# EAGLE board Board (EAGLE 5.06)
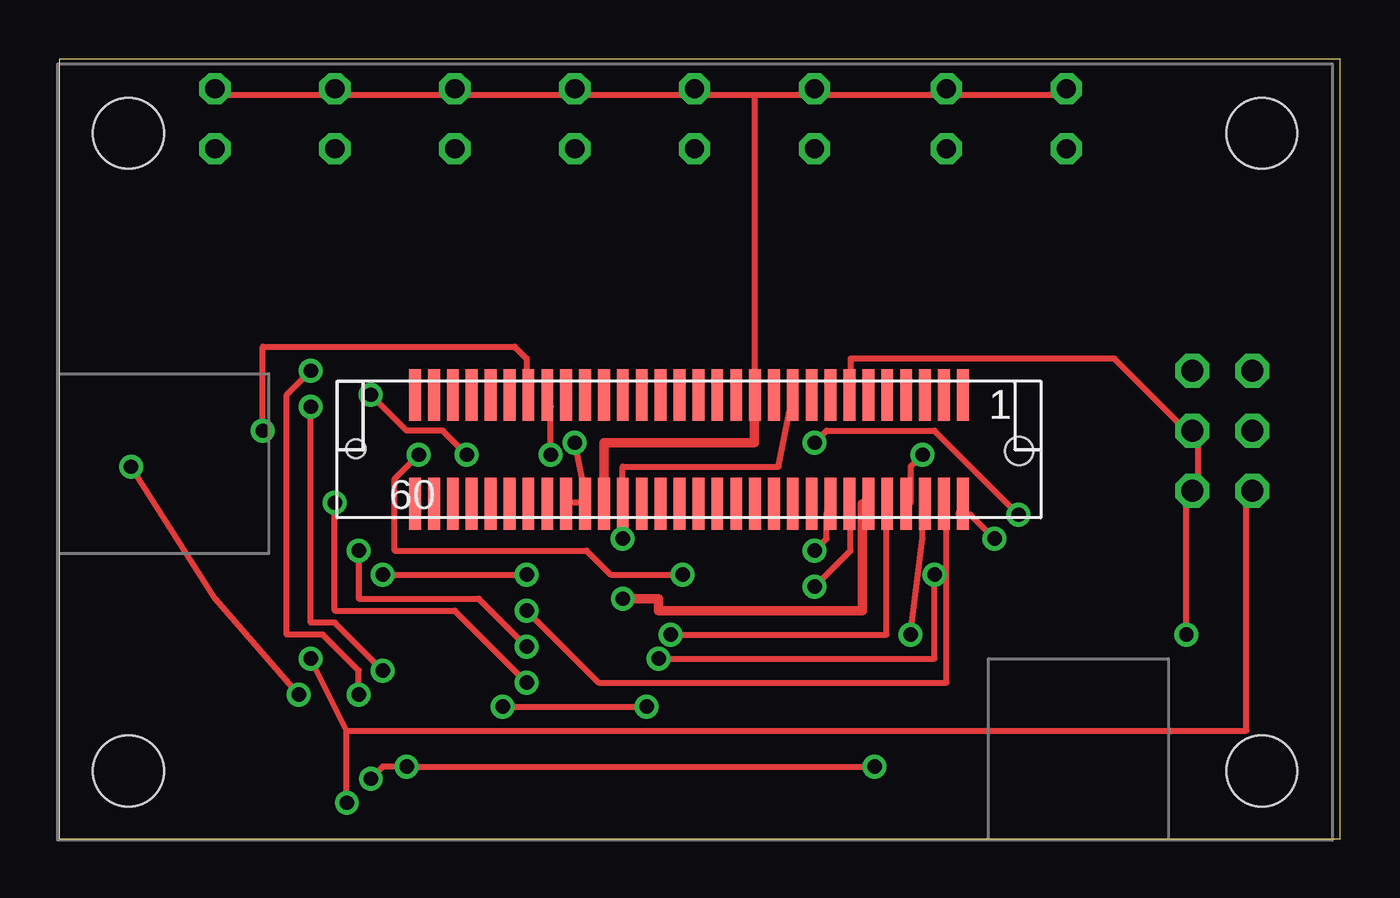
[diagram p0: board, top side]
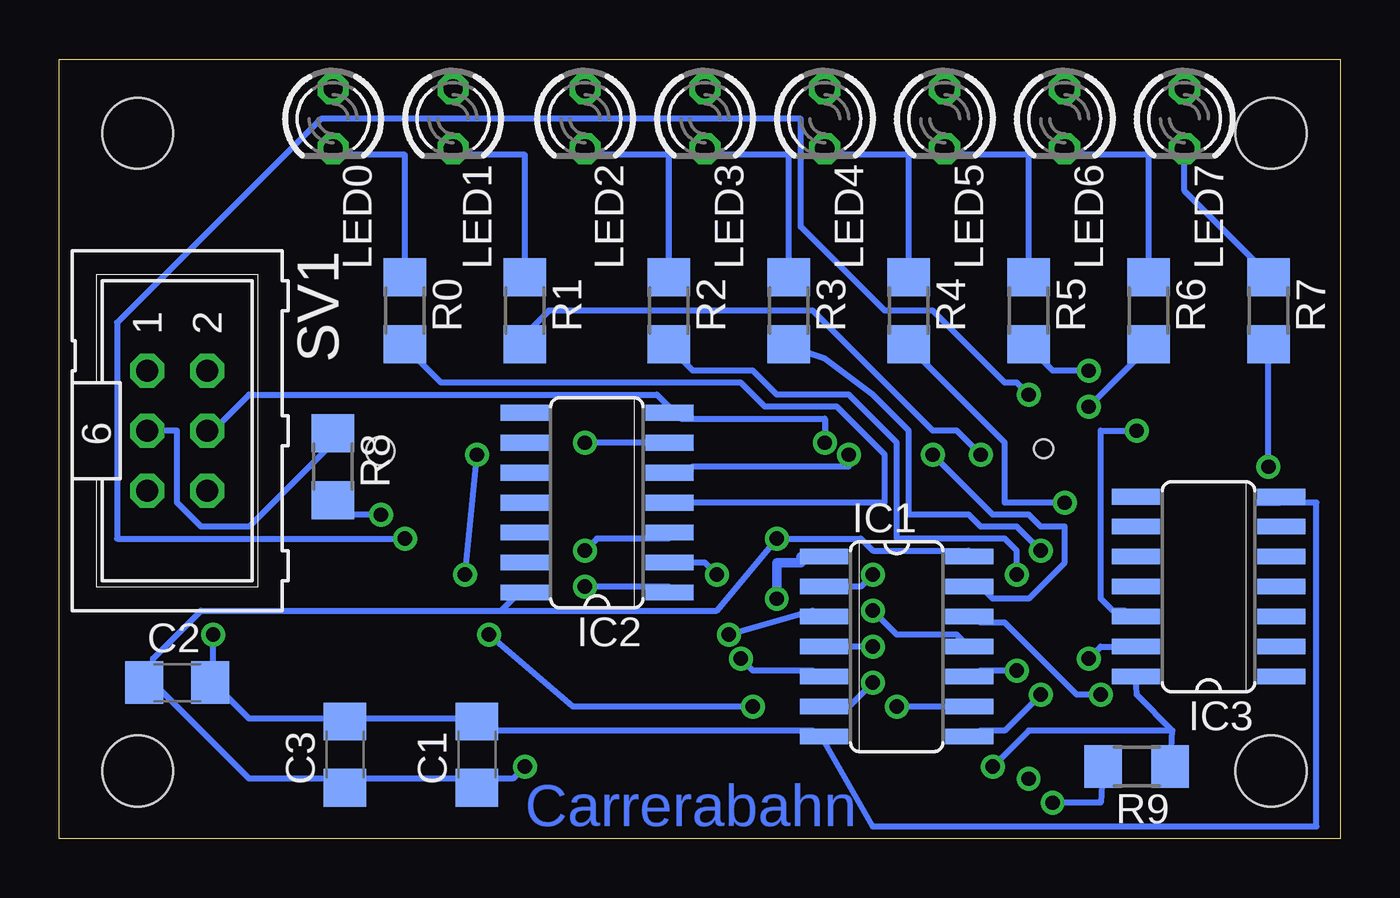
[diagram p1: board, bottom side, seen from below]

Size 54.28 x 33.01 mm. Coordinates in mm from the lower left corner, seen from the top.
Outline: 0,0 54.28,0 54.28,33.01 0,33.01 0,0
Copper layers (1*16): Top 0.035mm / dielectric 1.5mm / Bottom 0.035mm
Design rules "default": minimum track width 10mil, minimum drill 24mil, track to track 8mil, track to pad 8mil, pad to pad 8mil, via to via 8mil, smd to smd 8mil, copper to edge 40mil, drill to drill 8mil, minimum pad ring 10mil, minimum via ring 8mil, stop-mask expansion 4mil, vias tented up to drill 0mil, thermal gap 10mil

## Footprints (pad centres in the part's own frame; a part is rotated, then mirrored left to right if it is on the bottom)
C1206 = smd 1.6 x 1.8: 1 -1.4,0; 2 1.4,0
SO14 = smd 0.66 x 2.032: 1 -3.81,-3.073; 2 -2.54,-3.073; 3 -1.27,-3.073; 4 0,-3.073; 5 1.27,-3.073; 6 2.54,-3.073; 7 3.81,-3.073; 8 3.81,3.073; 9 2.54,3.073; 10 1.27,3.073; 11 0,3.073; 12 -1.27,3.073; 13 -2.54,3.073; 14 -3.81,3.073
LED3MM = drill 0.813 octagon: A -1.27,0; K 1.27,0
MCU_BOARD = smd 0.5 x 2.2: 1 11.612,2.274; 2 10.812,2.274; 3 10.012,2.274; 4 9.212,2.274; 5 8.412,2.274; 6 7.612,2.274; 7 6.812,2.274; 8 6.012,2.274; 9 5.212,2.274; 10 4.412,2.274; 11 3.612,2.274; 12 2.812,2.274; 13 2.012,2.274; 14 1.212,2.274; 15 0.412,2.274; 16 -0.388,2.274; 17 -1.188,2.274; 18 -1.988,2.274; 19 -2.788,2.274; 20 -3.588,2.274; 21 -4.388,2.274; 22 -5.188,2.274; 23 -5.988,2.274; 24 -6.788,2.274; 25 -7.588,2.274; 26 -8.388,2.274; 27 -9.188,2.274; 28 -9.988,2.274; 29 -10.788,2.274; 30 -11.588,2.274; 31 11.612,-2.326; 32 10.812,-2.326; 33 10.012,-2.326; 34 9.212,-2.326; 35 8.412,-2.326; 36 7.612,-2.326; 37 6.812,-2.326; 38 6.012,-2.326; 39 5.212,-2.326; 40 4.412,-2.326; 41 3.612,-2.326; 42 2.812,-2.326; 43 2.012,-2.326; 44 1.212,-2.326; 45 0.412,-2.326; 46 -0.388,-2.326; 47 -1.188,-2.326; 48 -1.988,-2.326; 49 -2.788,-2.326; 50 -3.588,-2.326; 51 -4.388,-2.326; 52 -5.188,-2.326; 53 -5.988,-2.326; 54 -6.788,-2.326; 55 -7.588,-2.326; 56 -8.388,-2.326; 57 -9.188,-2.326; 58 -9.988,-2.326; 59 -10.788,-2.326; 60 -11.588,-2.326 | hole 3: -23.728,-13.642; -23.728,13.358; 24.272,-13.642; 24.272,13.358 | hole 0.8: -14.1,0 | hole 1.2: 14,-0.1
R1206 = smd 1.6 x 1.803: 1 -1.422,0; 2 1.422,0
ML6 = drill 0.914 octagon: 1 -2.54,-1.27; 2 -2.54,1.27; 3 0,-1.27; 4 0,1.27; 5 2.54,-1.27; 6 2.54,1.27

## Placement (x,y rotation side)
C1  100nF  [C1206]  36.58,3.56 90 bottom
C2  100nF  [C1206]  49.28,6.6 0 bottom
C3  100nF  [C1206]  42.16,3.56 90 bottom
IC1  74AC06D  [SO14]  18.8,8.13 270 bottom
IC2  74ACT06D  [SO14]  31.5,14.22 90 bottom
IC3  74AC14D  [SO14]  5.59,10.67 90 bottom
LED0  [LED3MM]  42.67,30.48 270 bottom
LED1  [LED3MM]  37.59,30.48 270 bottom
LED2  [LED3MM]  32,30.48 270 bottom
LED3  [LED3MM]  26.92,30.48 270 bottom
LED4  [LED3MM]  21.84,30.48 270 bottom
LED5  [LED3MM]  16.76,30.48 270 bottom
LED6  [LED3MM]  11.68,30.48 270 bottom
LED7  [LED3MM]  6.6,30.48 270 bottom
MCU_BOARD1  [MCU_BOARD]  26.67,16.51 0 top
R0  150  [R1206]  39.62,22.35 270 bottom
R1  150  [R1206]  34.54,22.35 270 bottom
R2  150  [R1206]  28.45,22.35 270 bottom
R3  150  [R1206]  23.37,22.35 270 bottom
R4  150  [R1206]  18.29,22.35 270 bottom
R5  150  [R1206]  13.21,22.35 270 bottom
R6  150  [R1206]  8.13,22.35 270 bottom
R7  150  [R1206]  3.05,22.35 270 bottom
R8  18  [R1206]  42.67,15.75 270 bottom
R9  10K  [R1206]  8.64,3.05 180 bottom
SV1  [ML6]  49.28,17.27 270 bottom

## Library data of the parts
C1-C3 = rcl
IC1-IC3 = 74xx-eu
LED0 LED1-LED7 = led
MCU_BOARD1 = M_MCU-Board
R0 R1-R9 = resistor
SV1 = con-harting-ml

## Nets
3,3V: C1.1 C2.1 C3.1 IC1.14 IC2.14 IC3.14 MCU_BOARD1.10 MCU_BOARD1.49 R9.1
GND: C1.2 C2.2 C3.2 IC1.7 IC2.7 IC3.7 MCU_BOARD1.7 MCU_BOARD1.51 MCU_BOARD1.52 SV1.4 SV1.6
LED0: IC2.3 MCU_BOARD1.38
LED1: IC2.1 MCU_BOARD1.37
LED2: IC1.1 MCU_BOARD1.36
LED3: IC1.3 MCU_BOARD1.35
LED4: IC1.5 MCU_BOARD1.34
LED5: IC1.9 MCU_BOARD1.33
LED6: IC1.11 MCU_BOARD1.32
LED7: IC1.13 MCU_BOARD1.31
LS: IC3.13 R9.2 SV1.5
LS_AUS: IC2.5 MCU_BOARD1.23
LS_EIN: IC3.12 MCU_BOARD1.24
N$1: IC1.2 R2.2
N$2: IC1.4 R3.2
N$3: IC1.6 R4.2
N$4: IC1.8 R5.2
N$5: IC1.10 R6.2
N$6: IC1.12 R7.2
N$7: LED2.K R2.1
N$8: LED3.K R3.1
N$9: LED4.K R4.1
N$10: LED5.K R5.1
N$11: LED6.K R6.1
N$12: LED7.K R7.1
N$14: IC2.6 R8.2
N$15: LED1.K R1.1
N$16: IC2.2 R1.2
N$17: IC2.4 R0.2
N$19: R8.1 SV1.3
N$20: LED0.K R0.1
VCC: LED0.A LED1.A LED2.A LED3.A LED4.A LED5.A LED6.A LED7.A MCU_BOARD1.12 MCU_BOARD1.50

## Tracks (layer width: path | path; a pad name or v marks a point on that pad's centre or on a via)
3,3V  (via drill 0.6, 0.61)
  Top 0.254: MCU_BOARD1.10 30.99,18.29 30.48,15.75 23.88,15.75 23.88,14.22 MCU_BOARD1.49 23.88,13.72 v23.88,12.7 | v13.21,2.54 13.72,3.05 v14.73,3.05 v34.54,3.05
  Bottom 0.254: v14.73,3.05 13.21,4.57 7.11,4.57 | 7.11,4.57 8.64,6.1 IC3.14 | 36.58,2.54 42.16,2.54 | 50.29,6.6 46.23,2.54 42.16,2.54 | 42.16,2.54 C3.1 | 35.56,9.65 35.05,10.16 IC2.14 | 35.56,9.65 48.26,9.65 50.29,7.62 50.29,6.6 | 50.29,6.6 C2.1 | 35.56,9.65 26.42,9.65 v23.88,12.7 20.32,12.7 19.81,12.19 15.75,12.19 IC1.14 | v34.54,3.05 35.05,2.54 36.58,2.54 | 36.58,2.54 C1.1 | R9.1 7.11,4.57
GND  (via drill 0.61)
  Top 0.254: 22.35,14.22 21.34,14.22 MCU_BOARD1.52 | MCU_BOARD1.7 33.53,18.8 33.53,20.32 44.7,20.32 47.75,17.27 SV1.4 48.26,17.27 48.26,14.73 SV1.6 47.75,14.73 v47.75,8.64 | v21.84,16.76 22.35,14.22 | 22.35,14.22 MCU_BOARD1.51
  Bottom 0.254: SV1.4 47.75,17.27 46.23,18.8 28.96,18.8 28.45,18.29 IC2.7 27.94,17.78 21.84,17.78 v21.84,16.76 | 42.16,5.08 36.58,5.08 C1.2 36.58,4.57 22.35,4.57 IC1.7 21.84,4.06 19.81,0.51 1.02,0.51 1.02,14.22 2.54,14.22 | 47.75,6.6 46.23,5.08 42.16,5.08 | 42.16,5.08 C3.2 | 3.56,14.22 2.54,14.22 | 2.54,14.22 IC3.7 | 47.75,6.6 v47.75,8.64 | 47.75,6.6 C2.2
LED0  (via drill 0.61)
  Top 0.254: v32,12.19 32.51,12.7 32.51,13.72 MCU_BOARD1.38
  Bottom 0.254: v32,12.19 31.5,12.7 28.45,12.7 IC2.3
LED1  (via drill 0.61)
  Top 0.254: v32,10.67 33.53,12.19 33.53,13.72 MCU_BOARD1.37
  Bottom 0.254: v32,10.67 28.45,10.67 IC2.1
LED2  (via drill 0.6)
  Top 0.406: MCU_BOARD1.36 34.04,14.18 34.04,9.65 25.4,9.65 25.4,10.16 v23.88,10.16
  Bottom 0.406: IC1.1 22.86,11.94 22.86,11.68 23.88,11.68 v23.88,10.16
LED3  (via drill 0.61)
  Top 0.254: v25.91,8.64 35.05,8.64 35.05,13.72 MCU_BOARD1.35
  Bottom 0.254: v25.91,8.64 22.35,9.65 IC1.3
LED4  (via drill 0.61)
  Top 0.254: v25.4,7.62 37.08,7.62 v37.08,11.18 | v36.58,16.26 36.07,15.75 36.07,14.22 MCU_BOARD1.34
  Bottom 0.254: v25.4,7.62 24.89,7.11 22.35,7.11 IC1.5 | v37.08,11.18 v36.58,16.26
LED5  (via drill 0.61)
  Top 0.254: v18.8,5.59 v24.89,5.59 | v36.07,8.64 36.58,12.7 36.58,13.72 MCU_BOARD1.33
  Bottom 0.254: v24.89,5.59 32.51,5.59 v36.07,8.64 | IC1.9 v18.8,5.59
LED6  (via drill 0.61)
  Top 0.254: v19.81,9.65 22.86,6.6 37.59,6.6 37.59,13.72 MCU_BOARD1.32
  Bottom 0.254: v19.81,9.65 18.8,8.64 16.26,8.64 15.75,8.13 IC1.11
LED7  (via drill 0.61)
  Top 0.254: v17.27,16.26 16.26,17.27 14.73,17.27 v13.21,18.8 | v39.62,12.7 38.61,13.72 38.1,13.72 MCU_BOARD1.31
  Bottom 0.254: v17.27,16.26 14.73,13.72 13.21,13.72 12.7,13.21 11.68,13.21 11.68,11.68 13.21,10.16 14.73,10.16 15.24,10.67 IC1.13 | v13.21,18.8 13.72,19.3 14.22,19.3 17.27,22.35 19.3,22.35 22.86,25.91 22.86,30.48 43.18,30.48 51.82,21.84 51.82,12.7 v39.62,12.7
LS  (via drill 0.6, 0.61)
  Top 0.254: 12.19,4.57 v10.67,7.62 | v12.19,1.52 12.19,4.57 | 12.19,4.57 50.29,4.57 50.29,14.73 SV1.5
  Bottom 0.254: v10.67,7.62 10.16,8.13 IC3.13 | v12.19,1.52 10.16,1.52 R9.2
LS_AUS  (via drill 0.61)
  Top 0.254: v20.83,16.26 20.83,18.29 MCU_BOARD1.23
  Bottom 0.254: v20.83,16.26 20.83,15.75 27.43,15.75 IC2.5
LS_EIN  (via drill 0.61)
  Top 0.254: v8.64,17.27 8.64,20.83 19.3,20.83 19.81,20.32 19.81,18.8 MCU_BOARD1.24
  Bottom 0.254: v8.64,17.27 10.16,17.27 10.16,10.16 9.65,9.65 9.14,9.65 IC3.12
N$1  (via drill 0.61)
  Top 0.254: v13.72,11.18 v19.81,11.18
  Bottom 0.254: v13.72,11.18 13.72,12.19 14.22,12.7 18.8,12.7 18.8,16.76 20.83,18.8 23.88,18.8 24.89,19.81 27.43,19.81 28.45,20.83 R2.2 | v19.81,11.18 20.32,10.67 IC1.2
N$2  (via drill 0.61)
  Top 0.254: v12.7,12.19 12.7,10.16 17.78,10.16 v19.81,8.13
  Bottom 0.254: v12.7,12.19 13.72,13.21 15.24,13.21 15.75,13.72 18.29,13.72 18.29,17.27 19.81,18.8 21.84,20.32 23.37,20.83 R3.2 | v19.81,8.13 IC1.4
N$3  (via drill 0.61)
  Top 0.254: v11.68,14.22 11.68,9.65 16.76,9.65 v19.81,6.6
  Bottom 0.254: v11.68,14.22 14.22,14.22 14.22,16.76 18.29,20.83 R4.2 | v19.81,6.6 20.83,5.59 IC1.6
N$4  (via drill 0.61)
  Top 0.254: v10.67,19.81 9.65,18.8 9.65,8.64 11.18,8.64 12.7,7.11 v12.7,6.1
  Bottom 0.254: v10.67,19.81 12.19,19.81 13.21,20.83 R5.2 | v12.7,6.1 14.22,4.57 15.24,4.57 IC1.8
N$5  (via drill 0.61)
  Top 0.254: v10.67,18.29 10.67,9.14 11.68,9.14 v13.72,7.11
  Bottom 0.254: v10.67,18.29 8.13,20.83 R6.2 | v13.72,7.11 15.24,7.11 IC1.10
N$6  (via drill 0.61)
  Top 0.254: v3.05,15.75 6.6,10.16 v10.16,6.1
  Bottom 0.254: v10.16,6.1 11.18,6.1 14.22,9.14 15.24,9.14 IC1.12 | v3.05,15.75 R7.2
N$7
  Bottom 0.254: R2.1 28.45,28.96 32,28.96 LED2.K
N$8
  Bottom 0.254: R3.1 23.37,28.96 26.92,28.96 LED3.K
N$9
  Bottom 0.254: R4.1 18.29,28.96 21.84,28.96 LED4.K
N$10
  Bottom 0.254: R5.1 13.21,28.96 16.76,28.96 LED5.K
N$11
  Bottom 0.254: R6.1 8.13,28.96 11.68,28.96 LED6.K
N$12
  Bottom 0.254: R7.1 3.05,23.88 6.6,27.43 LED7.K
N$14  (via drill 0.61)
  Top 0.254: v40.64,13.72 37.08,17.27 32.51,17.27 v32,16.76
  Bottom 0.254: v40.64,13.72 42.16,13.72 42.67,14.22 R8.2 | IC2.6 v32,16.76
N$15
  Bottom 0.254: R1.1 34.54,28.96 37.59,28.96 LED1.K
N$16  (via drill 0.61)
  Top 0.254: v15.24,16.26 14.22,15.24 14.22,12.19 22.35,12.19 23.37,11.18 v26.42,11.18
  Bottom 0.254: v15.24,16.26 16.26,17.27 17.27,17.27 22.35,22.35 33.53,22.35 34.54,21.34 R1.2 | v26.42,11.18 26.92,11.68 IC2.2
N$17
  Bottom 0.254: R0.2 39.62,20.83 38.1,19.3 25.4,19.3 24.38,18.29 21.34,18.29 19.3,16.26 19.3,14.22 IC2.4
N$19
  Bottom 0.254: R8.1 42.67,16.76 46.23,13.21 48.26,13.21 49.28,14.22 49.28,17.27 SV1.3
N$20
  Bottom 0.254: R0.1 39.62,28.96 42.67,28.96 LED0.K
VCC
  Top 0.254: 11.68,31.5 6.6,31.5 LED7.A | 11.68,31.5 16.76,31.5 | 11.68,31.5 LED6.A | 16.76,31.5 21.84,31.5 | 16.76,31.5 LED5.A | 37.59,31.5 42.67,31.5 LED0.A | 29.46,31.5 29.46,18.8 MCU_BOARD1.12 | 26.92,31.5 29.46,31.5 | 29.46,31.5 32,31.5 | 32,31.5 37.59,31.5 | 37.59,31.5 LED1.A | 32,31.5 LED2.A | 21.84,31.5 26.92,31.5 | 21.84,31.5 LED4.A | 26.92,31.5 LED3.A
  Top 0.406: MCU_BOARD1.50 23.08,16.76 29.46,16.76 29.46,18.78 MCU_BOARD1.12

## Text on the board
Bottom: Carrerabahn